# Altium PCB sync.PcbDoc
Units mil, origin at the board's own origin, x right, y up, seen from the top; angles counter-clockwise.
Board outline 2367.23 x 1579.83 mil, 2 copper layers (Top Layer, Bottom Layer); 4 components, 8 nets, 99 pads, 1 vias.
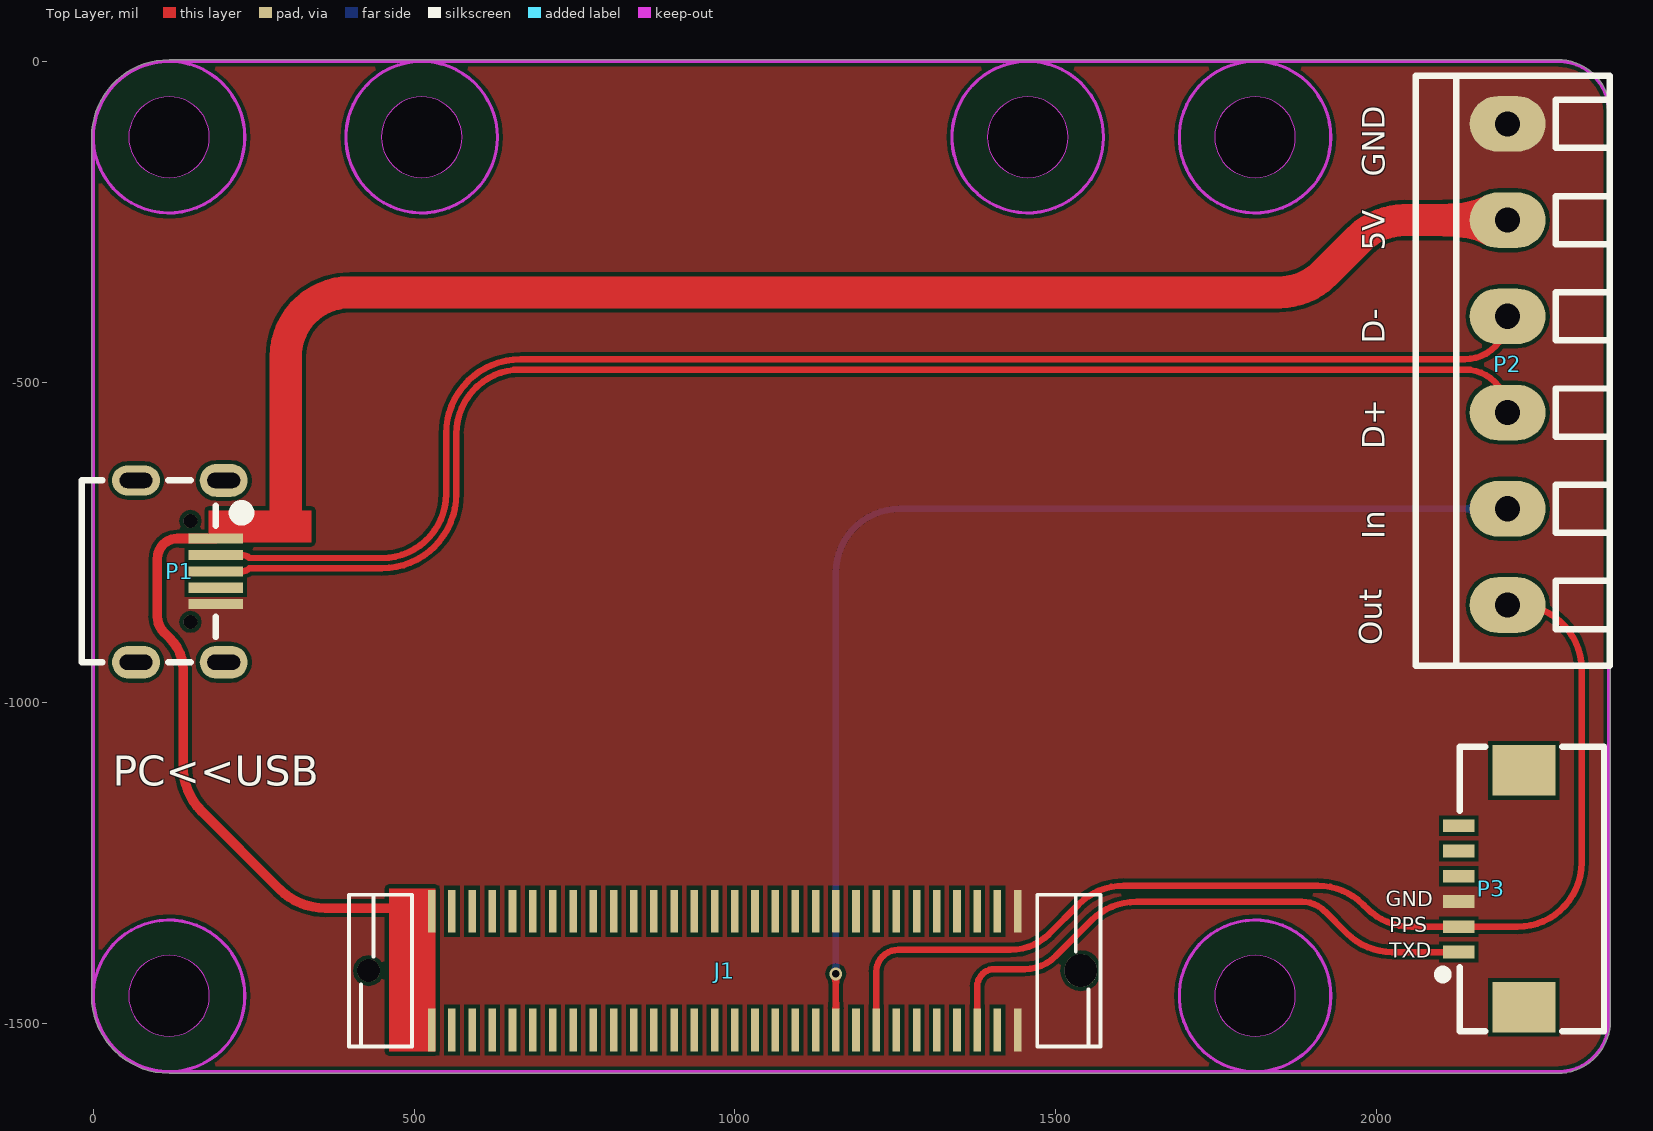
[diagram p0: Top Layer view]
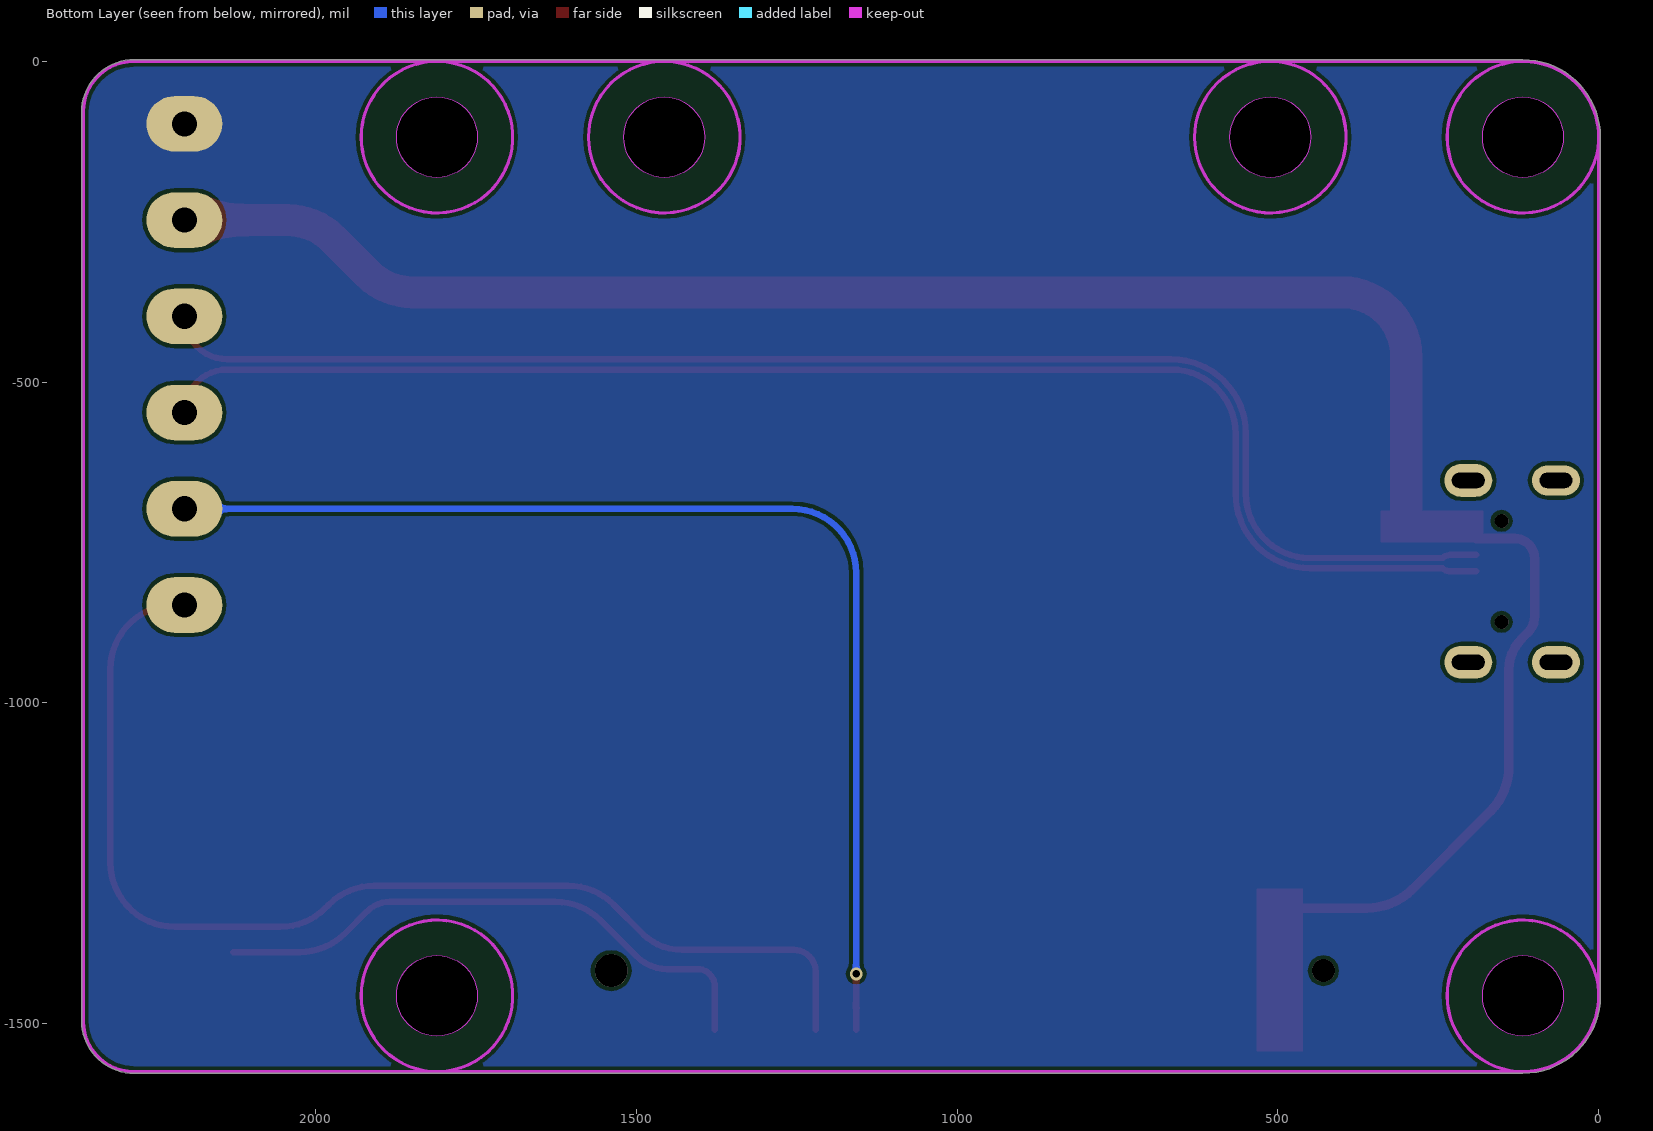
[diagram p1: Bottom Layer view, seen from below]

## Layer stack, top to bottom
Top Solder: solder mask 0.4, Solder Resist, Dk 3.5
Top Layer: signal copper 1.4
Dielectric 1: dielectric 12.6, FR-4, Dk 4.8
Bottom Layer: signal copper 1.4
Bottom Solder: solder mask 0.4, Solder Resist, Dk 3.5

## Board outline
118.11,-1577.32 ccw(c118.11,-1574.8) 119.1,-1577.12 ccw(c120.09,-1574.8) 120.09,-1577.32 2283.46,-1577.32 ccw(c2283.46,-1496.06) 2364.72,-1496.06 2364.72,-78.74 ccw(c2283.46,-78.74) 2283.46,2.51 120.09,2.51 ccw(c120.09,0) 119.1,2.31 ccw(c118.11,0) 118.11,2.52 ccw(c118.11,-118.11) -2.51,-118.11 -2.51,-1456.69 ccw(c118.11,-1456.69)
cut-out: 1748.03,-118.11 ccw(c1811.02,-118.11) 1811.02,-181.1 ccw(c1811.02,-118.11) 1874.02,-118.11 ccw(c1811.02,-118.11) 1811.02,-55.12 ccw(c1811.02,-118.11)
cut-out: 1748.03,-1456.69 ccw(c1811.02,-1456.69) 1811.02,-1519.68 ccw(c1811.02,-1456.69) 1874.02,-1456.69 ccw(c1811.02,-1456.69) 1811.02,-1393.7 ccw(c1811.02,-1456.69)
cut-out: 55.12,-1456.69 ccw(c118.11,-1456.69) 118.11,-1519.68 ccw(c118.11,-1456.69) 181.1,-1456.69 ccw(c118.11,-1456.69) 118.11,-1393.7 ccw(c118.11,-1456.69)
cut-out: 55.12,-118.11 ccw(c118.11,-118.11) 118.11,-181.1 ccw(c118.11,-118.11) 181.1,-118.11 ccw(c118.11,-118.11) 118.11,-55.12 ccw(c118.11,-118.11)
cut-out: 1393.7,-118.11 ccw(c1456.69,-118.11) 1456.69,-181.1 ccw(c1456.69,-118.11) 1519.68,-118.11 ccw(c1456.69,-118.11) 1456.69,-55.12 ccw(c1456.69,-118.11)
cut-out: 448.82,-118.11 ccw(c511.81,-118.11) 511.81,-181.1 ccw(c511.81,-118.11) 574.8,-118.11 ccw(c511.81,-118.11) 511.81,-55.12 ccw(c511.81,-118.11)

## Design rules (kind name [scope] priority, off if disabled: settings)
Clearance 24V [InNetClass('24V')] p1: gap=12
Clearance [All] p2: gap=6
ComponentClearance [All] p1: gap=0 collisioncheckmode=3 verticalgap=0 showdistances=FALSE
DiffPairsRouting [All] p1: maxlimit=10 minlimit=6 mostfreqgap=6 toplayer_minwidth=10 toplayer_maxwidth=10 toplayer_prefwidth=10 bottomlayer_minwidth=10 bottomlayer_maxwidth=10 bottomlayer_prefwidth=10 maxuncoupledlength=500
HoleSize [All] p1: absolutevalues=TRUE maxlimit=10000 minlimit=12 maxpercent=80.000 minpercent=20.000
HoleToHoleClearance [All] p1: gap=6 allowstackedmicrovias=TRUE
MinimumSolderMaskSliver [All] p1: minsoldermaskwidth=0
PolygonConnect VIA [OnLayer('Multi-Layer')] p1: connectstyle=Direct reliefconductorwidth=10 reliefentries=4 polygonreliefangle="90 Angle" airgapwidth=10
PolygonConnect [All] p2: connectstyle=Direct reliefconductorwidth=10 reliefentries=4 polygonreliefangle="90 Angle" airgapwidth=10
RoutingVias [All] p1: holewidth=12 width=15 viastyle="Through Hole" minholewidth=12 minwidth=12 maxholewidth=200 maxwidth=200
SilkToBoardRegionClearance [All] p1 off:
SilkToSilkClearance [All] p1: silktosilkclearance=0
SilkToSolderMaskClearance [IsPad] p1: minsilkscreentomaskgap=0 clearancetoexposedcopper=TRUE
SolderMaskExpansion [All] p1: expansion=4
Width [All] p1: maxlimit=10000 minlimit=6 preferedwidth=10
22 further rules are at their usual default settings.

## Classes and differential pairs
differential pair USB_IMU: +USB_IMU_P -USB_IMU_N

## Components (designator, comment, footprint, x,y, rotation, side; value= is the part's Value field where it differs from the comment)
J1 "STM32F405RGT6核心板" 3710F060037G0FR01 984.25,-1417.32 r90 top
P1 "Micro USB" "Micro USB" 135,-795 r270 top
P2 "KF-6P" KF128-3.81-6P 2204.72,-472.44 r90 top
P3 "SH1.0-6P" FPC1.0-2H-WS-6P 2230,-1290 r90 top

## Footprints (in the part's own frame and the unit in brackets; to place one, negate y for a bottom-side part, rotate by r counter-clockwise, add the part's x,y. Pads: shape width x height; smd on the part's side, far side on the other; paste and mask are expansions set on the pad)
3710F060037G0FR01 [mm]
  rect 1.7x0.3 smd: 1(-2.35,11.6) 2(-2.35,10.8) 3(-2.35,10) 4(-2.35,9.2) 5(-2.35,8.4) 6(-2.35,7.6) 7(-2.35,6.8) 8(-2.35,6) 9(-2.35,5.2) 10(-2.35,4.4) 11(-2.35,3.6) 12(-2.35,2.8) 13(-2.35,2) 14(-2.35,1.2) 15(-2.35,0.4) 16(-2.35,-0.4) 17(-2.35,-1.2) 18(-2.35,-2) 19(-2.35,-2.8) 20(-2.35,-3.6) 21(-2.35,-4.4) 22(-2.35,-5.2) 23(-2.35,-6) 24(-2.35,-6.8) 25(-2.35,-7.6) 26(-2.35,-8.4) 27(-2.35,-9.2) 28(-2.35,-10) 29(-2.35,-10.8) 30(-2.35,-11.6) 31(2.35,-11.6) 32(2.35,-10.8) 33(2.35,-10) 34(2.35,-9.2) 35(2.35,-8.4) 36(2.35,-7.6) 37(2.35,-6.8) 38(2.35,-6) 39(2.35,-5.2) 40(2.35,-4.4) 41(2.35,-3.6) 42(2.35,-2.8) 43(2.35,-2) 44(2.35,-1.2) 45(2.35,-0.4) 46(2.35,0.4) 47(2.35,1.2) 48(2.35,2) 49(2.35,2.8) 50(2.35,3.6) 51(2.35,4.4) 52(2.35,5.2) 53(2.35,6) 54(2.35,6.8) 55(2.35,7.6) 56(2.35,8.4) 57(2.35,9.2) 58(2.35,10) 59(2.35,10.8) 60(2.35,11.6)
  round 0.9 hole 0.9: FH(0,14.1)
  round 1.3 hole 1.3: FH(0,-14.1)
  silkscreen extent -3,-14.87 3,14.87
FPC1.0-2H-WS-6P [mm] "翻盖FPC，脚距1mm，不含脚（长10.9mm，宽5.2mm，高1.96mm）"
  rect 2x2.5 smd: 0(-4.69,0) 0(4.69,0)
  rect 0.5x1.25 smd: 1(-2.5,2.575) 2(-1.5,2.575) 3(-0.5,2.575) 4(0.5,2.575) 5(1.5,2.575) 6(2.5,2.575)
  silkscreen extent -5.64,-3.18 5.64,3.31, body extent -5.45,-3.15 5.45,2.85, height 2
KF128-3.81-6P [mm] "螺钉式接线端子，脚距3.81mm"
  oval 2.2x3 hole 1: 1(-9.525,0) 2(-5.715,0) 3(-1.905,0) 4(1.905,0) 5(5.715,0) 6(9.525,0)
  silkscreen extent -11.94,-4.04 11.43,3.63, body extent -11.93,-3.9 11.43,3.5, height 8.55
"Micro USB" [mm]
  oval 1.2x1.9 hole 0.6 slot 1.3 at 90 deg: 0(-3.6,-1.735)
  oval 1.3x1.9 hole 0.6 slot 1.3 at 90 deg: 0(-3.6,1.735) 0(3.6,-1.735) 0(3.6,1.735)
  rect 0.4x2.15 smd: 1(-1.3,1.425) 2(-0.65,1.425) 3(0,1.425) 4(0.65,1.425) 5(1.3,1.425)
  round 0.55 hole 0.55: FX(-2,0.415) FX(2,0.415)
  silkscreen extent -3.6,-3.88 3.6,2.7

## Part data
J1: "3710(F/M)060037G0FR01"
P1: "Micro USB底座"

## Free pads (board coordinates)
  round 216.54 on Top Solder: ""(118.11,-1456.69) ""(118.11,-118.11) ""(511.81,-118.11) ""(1456.69,-118.11) ""(1811.02,-1456.69) ""(1811.02,-118.11)
  round 216.54 on Bottom Solder: ""(118.11,-1456.69) ""(118.11,-118.11) ""(511.81,-118.11) ""(1456.69,-118.11) ""(1811.02,-1456.69) ""(1811.02,-118.11)

## Via types
v1: diameter 20, hole 12, Top Layer to Bottom Layer, tented both sides, 1 vias

## Nets (pads, with @x,y where several pads share a name; then routed paths per layer and width w, separated by ;. In a path a pad name is that pad's centre, name@x,y a point inside that pad or via, vN(x,y) a via of type N, cw(c..) or ccw(c..) an arc to the next point about the centre after c; other vN are vias at no path point)
GND: J1.30 J1.31 P1.5 P2.6 P3.3
PPS: J1.23 P2.1 P3.2 | length 1792
  Top Layer w10: J1.23 1220.47,-1419.53 cw(c1255,-1419.53) 1255,-1385 1429.64,-1385 ccw(c1429.64,-1299.64) 1490,-1360 1535.71,-1314.29 cw(c1606.42,-1385) 1606.42,-1285 1908.58,-1285 cw(c1908.58,-1385) 1979.29,-1314.29 1985,-1320 ccw(c2055.15,-1249.85) 2055.15,-1349.06 P3.2 2220,-1349.06 ccw(c2220,-1249.06) 2320,-1249.06 2320,-947.44 ccw(c2220,-947.44) 2220,-847.44 P2.1
SYNC_IN: J1.21 P2.2 | length 1816.7
  Top Layer w10: J1.21 v1(1157.48,-1422.48)
  Bottom Layer w10: v1(1157.48,-1422.48) 1157.48,-797.44 cw(c1257.48,-797.44) 1257.48,-697.44 P2.2
USART3_RX: J1.29
USART3_TX: J1.28 P3.1 | length 896.1
  Top Layer w10: J1.28 1377.95,-1442.05 cw(c1405,-1442.05) 1405,-1415 1451.72,-1415 ccw(c1451.72,-1346.72) 1500,-1395 1555.71,-1339.29 cw(c1626.42,-1410) 1626.42,-1310 1883.79,-1310 cw(c1883.79,-1361.21) 1919.99,-1324.99 1954.14,-1359.14 ccw(c2024.85,-1288.43) 2024.85,-1388.43 P3.1
USB_IMU_N: P1.2 P2.4 | length 2270.2
  Top Layer w10: P1.2 231.64,-769.41 cw(c231.64,-785.78) 243.22,-774.2 450,-774.2 ccw(c450,-674.2) 550,-674.2 550,-580.44 cw(c666,-580.44) 666,-464.44 2137.72,-464.44 ccw(c2137.72,-397.44) P2.4
USB_IMU_P: P1.3 P2.3 | length 2270.2
  Top Layer w10: P1.3 231.64,-795 ccw(c231.64,-778.63) 243.22,-790.2 450,-790.2 ccw(c450,-674.2) 566,-674.2 566,-580.44 cw(c666,-580.44) 666,-480.44 2137.72,-480.44 cw(c2137.72,-547.44) P2.3
VCC_5V: J1.1 J1.60 P1.1 P2.5 | length 3161.7
  Top Layer w15: P1.1 131.18,-743.82 ccw(c131.18,-775) 100,-775 100,-865 ccw(c136.21,-865) 110.61,-890.61 120,-900 cw(c71.72,-948.28) 140,-948.28 140,-1098.58 ccw(c240,-1098.58) 169.29,-1169.29 290.71,-1290.71 ccw(c361.42,-1220) 361.42,-1320 490,-1320
  Top Layer w50: 300,-720 300,-460 cw(c400,-460) 400,-360 1848.58,-360 ccw(c1848.58,-260) 1919.29,-330.71 1973.27,-276.73 cw(c2043.98,-347.44) 2043.98,-247.44 P2.5
pads on no net: J1.2 J1.3 J1.4 J1.5 J1.6 J1.7 J1.8 J1.9 J1.10 J1.11 J1.12 J1.13 J1.14 J1.15 J1.16 J1.17 J1.18 J1.19 J1.20 J1.22 J1.24 J1.25 J1.26 J1.27 J1.32 J1.33 J1.34 J1.35 J1.36 J1.37 J1.38 J1.39 J1.40 J1.41 J1.42 J1.43 J1.44 J1.45 J1.46 J1.47 J1.48 J1.49 J1.50 J1.51 J1.52 J1.53 J1.54 J1.55 J1.56 J1.57 J1.58 J1.59 J1.FH P1.0 P1.4 P1.FX P3.0 P3.4 P3.5 P3.6

## Polygon pours and split planes (outlines as drawn)
GND on Bottom Layer "Bottom Layer-No Net" (solid, remove dead copper, pour order 2): -7032.2,-1382.76 -6967.2,-1317.76 -6967.2,922.24 -4167.2,922.24 -4007.2,762.24 -4097.2,672.24 -4097.2,-1687.76
GND on Bottom Layer "Bottom Layer-GND" (solid, remove dead copper, pour order 8): -645.67,341.54 -769.69,217.52 -769.69,-1938.98 2454.72,-1938.98 2538.39,-1855.32 2627.95,-1765.75 2627.95,643.7
GND on Top Layer "Top Layer-No Net" (solid, remove dead copper, pour order 4): -7067.2,-1422.76 -7067.2,762.24 -6962.2,867.24 -6872.2,777.24 -3947.2,777.24 -3947.2,-1507.76 -3962.2,-1522.76
GND on Top Layer "Bottom Layer-GND" (solid, remove dead copper, pour order 10): -511.81,406.5 -511.81,-2157.48 -531.5,-2177.17 -363.19,-2008.86 2701.77,-2008.86 2701.77,620.08 2632.87,688.98

## Keep-outs
Keep-Out Layer:
  circle w5: c1811.02,-1456.69 r118.11
  circle w5: c1811.02,-118.11 r118.11
  circle w5: c511.81,-118.11 r118.11
  circle w5: c1456.69,-118.11 r118.11
  circle w5: c118.11,-118.11 r118.11
  circle w5: c118.11,-1456.69 r118.11
  lines w5: 118.11,-1574.8 cw(c118.11,-1456.69) 0,-1456.69 0,-118.11 cw(c118.11,-118.11) 118.11,0 ; 120.09,-1574.8 2283.46,-1574.8 ccw(c2283.46,-1496.06) 2362.2,-1496.06 2362.2,-78.74 ccw(c2283.46,-78.74) 2283.46,0 120.09,0

## Other copper
Top Layer:
  rectangle net VCC_5V: 460.63,-1543.31 533.46,-1289.37
  rectangle net VCC_5V: 180,-750 340,-700

## Silkscreen, mask and mechanical layers (free items; w line width, h text height)
Top Overlay:
  text "GND" at 2025,-180 h60 r90
  text "5V" at 2025,-295 h60 r90
  text "D-" at 2025,-440 h60 r90
  text "D+" at 2025,-605 h60 r90
  text "In" at 2025,-745 h60 r90
  text "Out" at 2020,-910 h60 r90
  text "PC<<USB" at 30,-1145 h80
  text "GND" at 2015,-1325 h40
  text "PPS" at 2020,-1365 h40
  text "TXD" at 2020,-1405 h40
Mechanical 1:
  circle w5: c1811.02,-118.11 r62.99
  circle w5: c1811.02,-1456.69 r62.99
  circle w5: c118.11,-1456.69 r62.99
  circle w5: c118.11,-118.11 r62.99
  circle w5: c511.81,-118.11 r62.99
  circle w5: c1456.69,-118.11 r62.99
Mechanical 15:
  lines w5: 98.43,-1456.69 137.8,-1456.69 ; 98.43,-118.11 137.8,-118.11 ; 118.11,-1476.38 118.11,-1437.01 ; 118.11,-137.8 118.11,-98.43 ; 393.7,-1535.43 393.7,-1574.8 ; 393.7,-1377.95 393.7,-196.85 ; 393.7,-39.37 393.7,0 433.07,0 ; 433.07,-1574.8 393.7,-1574.8 ; 492.13,-118.11 531.5,-118.11 ; 511.81,-137.8 511.81,-98.43 ; 590.55,0 787.4,0 ; 944.25,-1417.32 1024.25,-1417.32 ; 944.88,-1574.8 1023.62,-1574.8 ; 944.88,0 1023.62,0 ; 964.57,-1417.32 1003.94,-1417.32 ; 984.25,-1574.8 984.25,-1535.43 ; 984.25,-1457.32 984.25,-1377.32 ; 984.25,-1437.01 984.25,-1397.64 ; 984.25,-39.37 984.25,0 ; 1181.1,0 1377.95,0 ; 1437.01,-118.11 1476.38,-118.11 ; 1456.69,-137.8 1456.69,-98.43 ; 1535.43,-1574.8 1574.8,-1574.8 1574.8,-1535.43 ; 1535.43,0 1574.8,0 1574.8,-39.37 ; 1574.8,-1377.95 1574.8,-196.85 ; 1791.34,-1456.69 1830.71,-1456.69 ; 1791.34,-118.11 1830.71,-118.11 ; 1811.02,-1476.38 1811.02,-1437.01 ; 1811.02,-137.8 1811.02,-98.43 ; 1929.13,-1456.69 1929.13,-118.11 ; 393.7,-1574.8 393.7,-1574.8